# Altium PCB develer_2L_Ax_panel.PcbDoc
Units mm, origin at the board's own origin, x right, y up, seen from the top; angles counter-clockwise.
Board outline 129 x 103 mm, 6 copper layers (Top Layer, GND, Inner, Inner2, Power, Bottom Layer), stack 0.815 mm thick; 6 components, 77 nets, 10 pads, 0 vias.
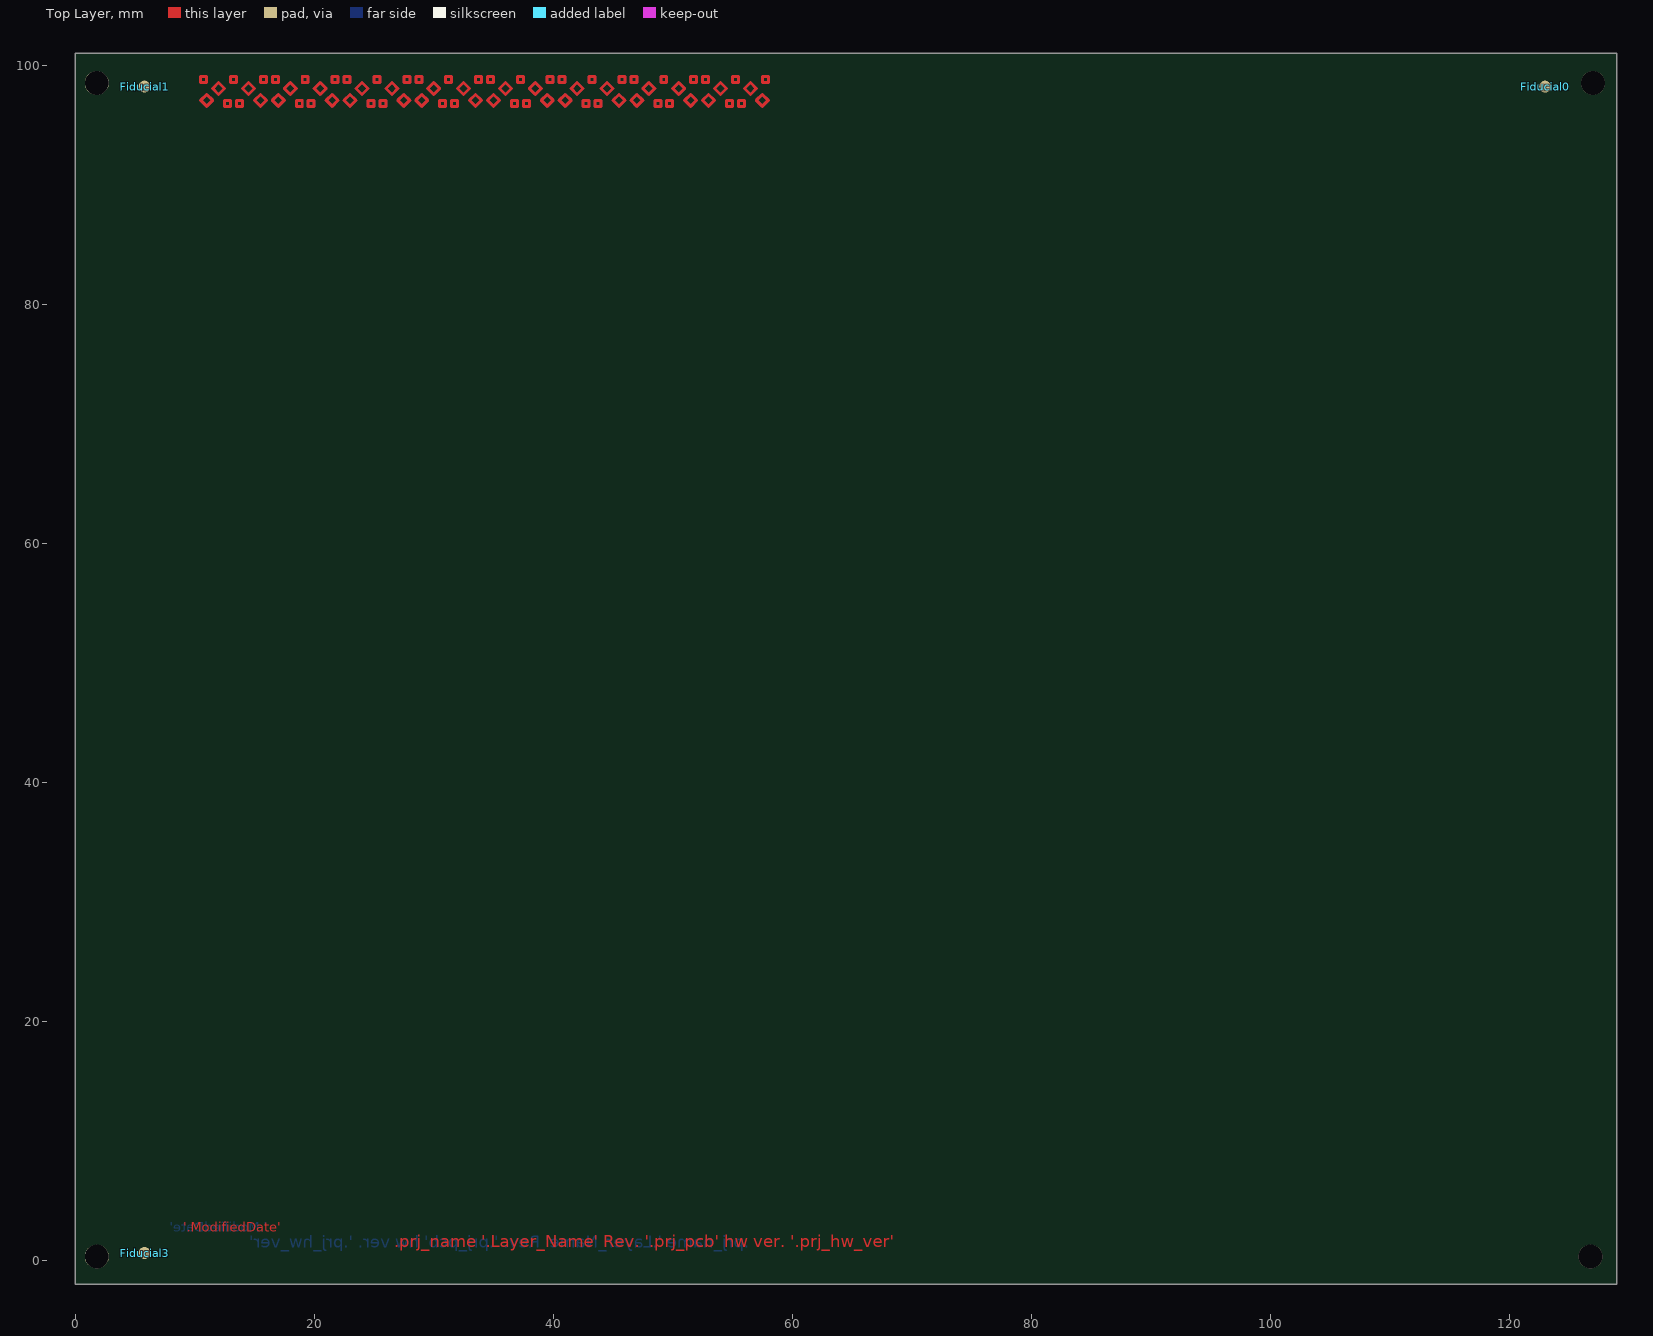
[diagram p0: Top Layer view]
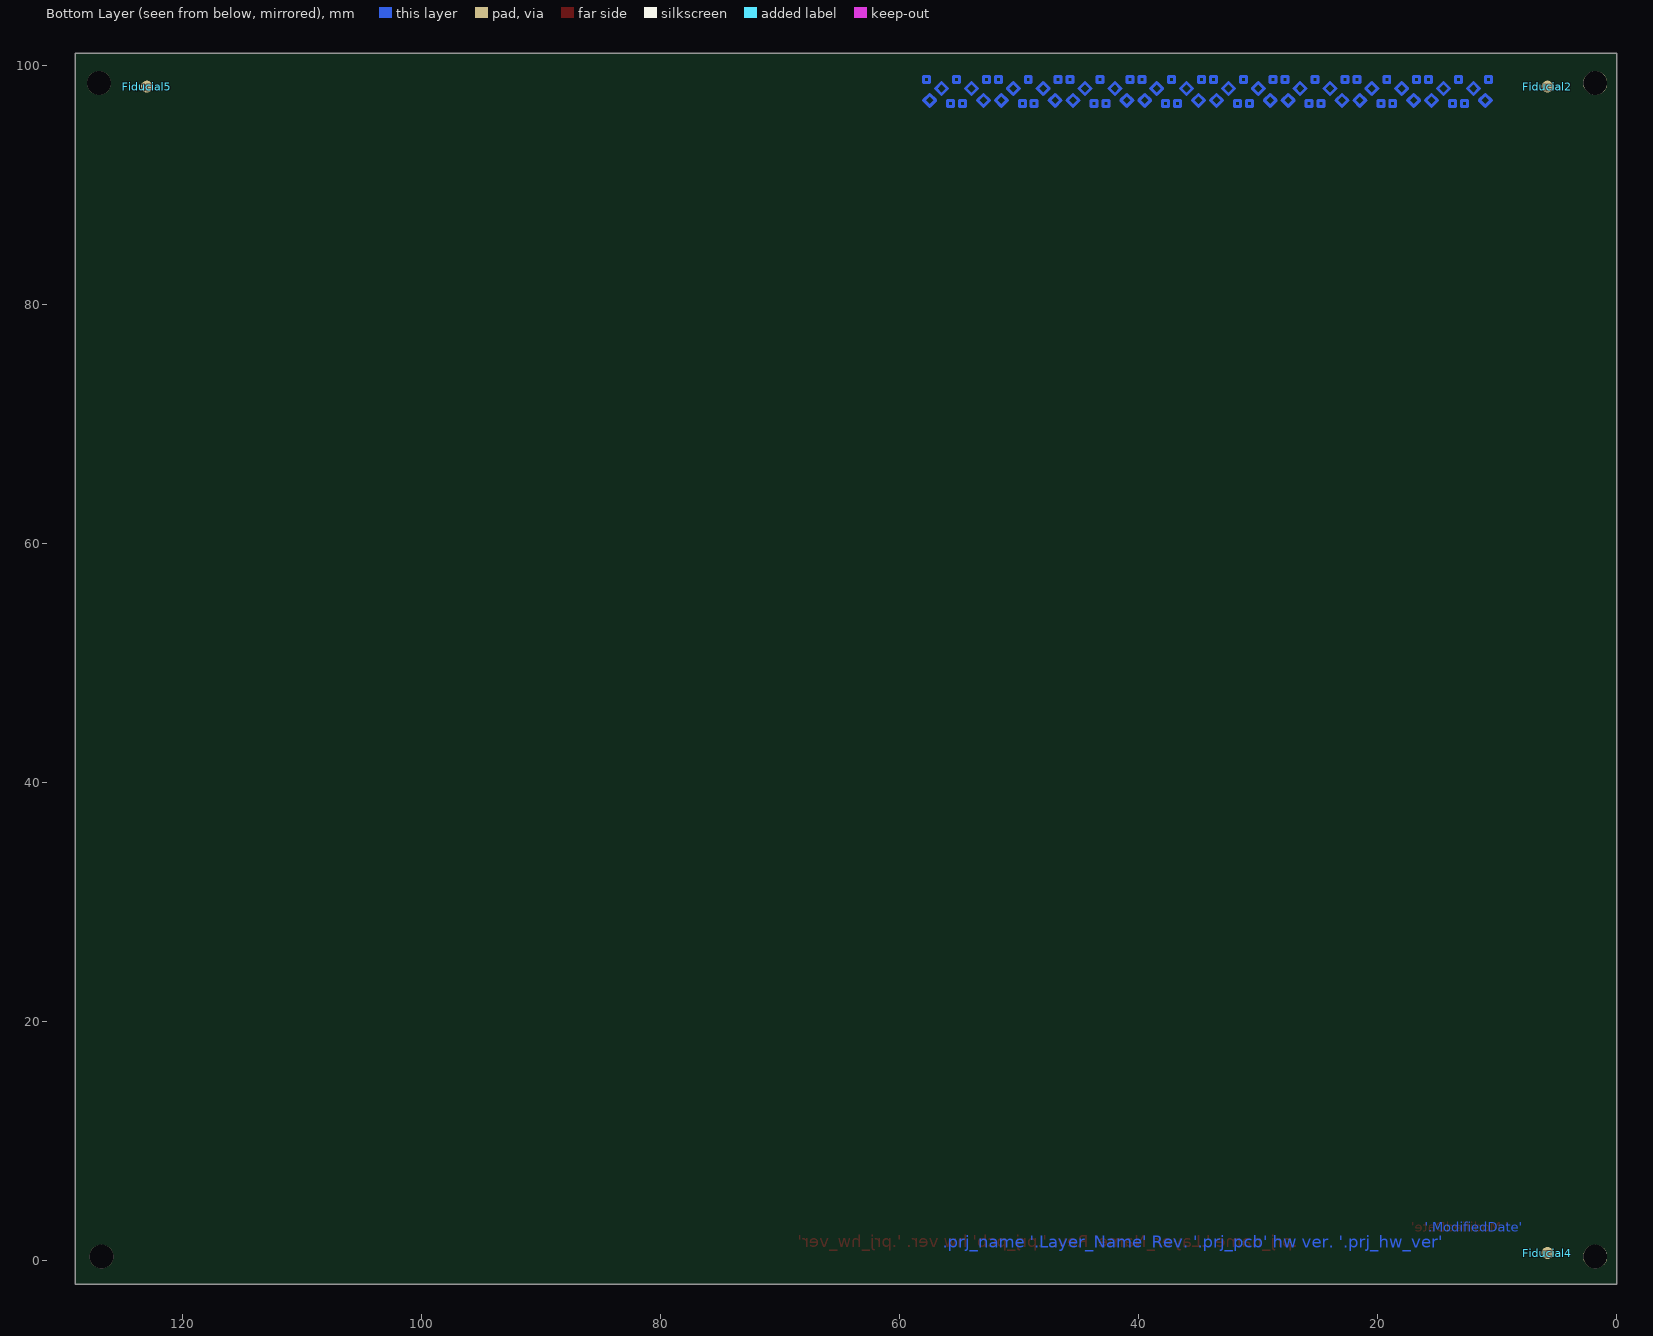
[diagram p1: Bottom Layer view, seen from below]
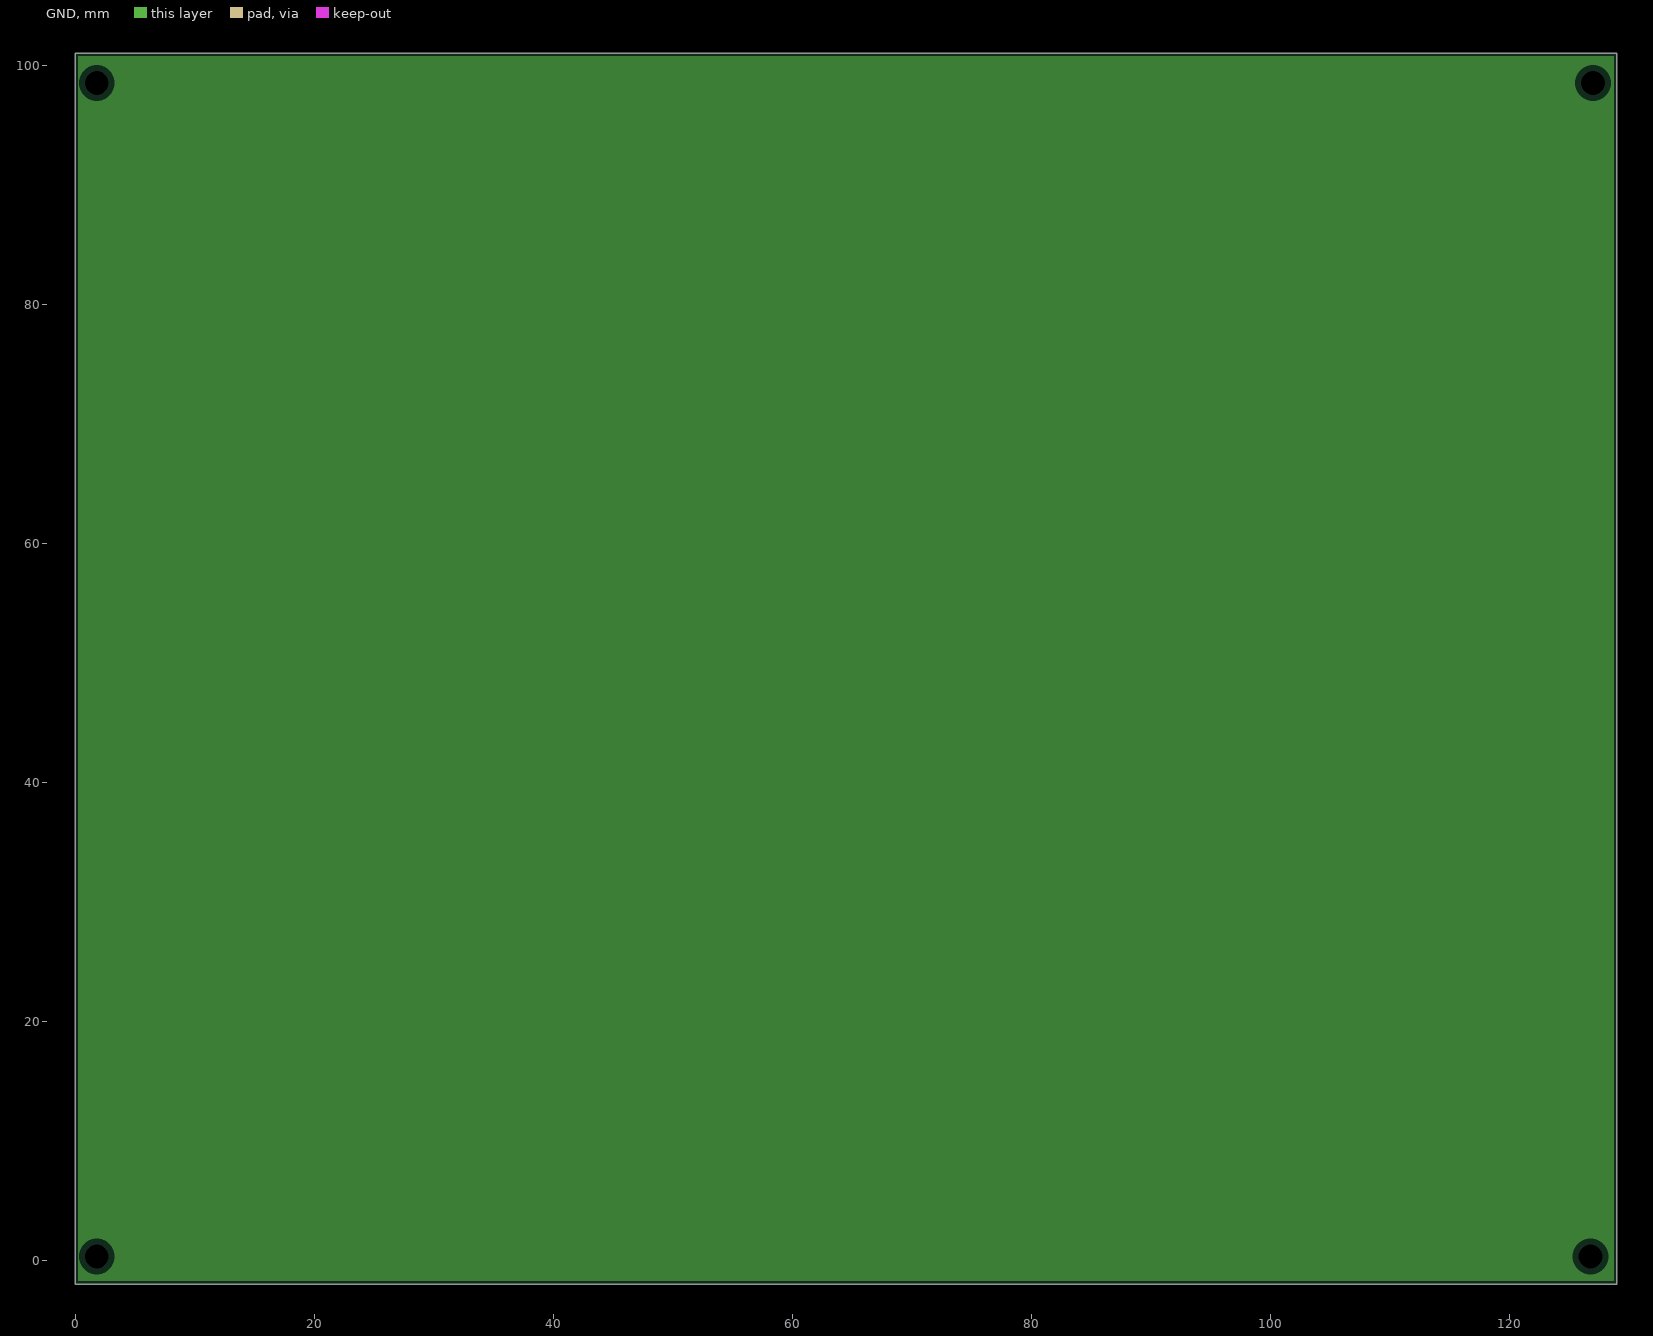
[diagram p2: GND, clearances drawn from the general rule]
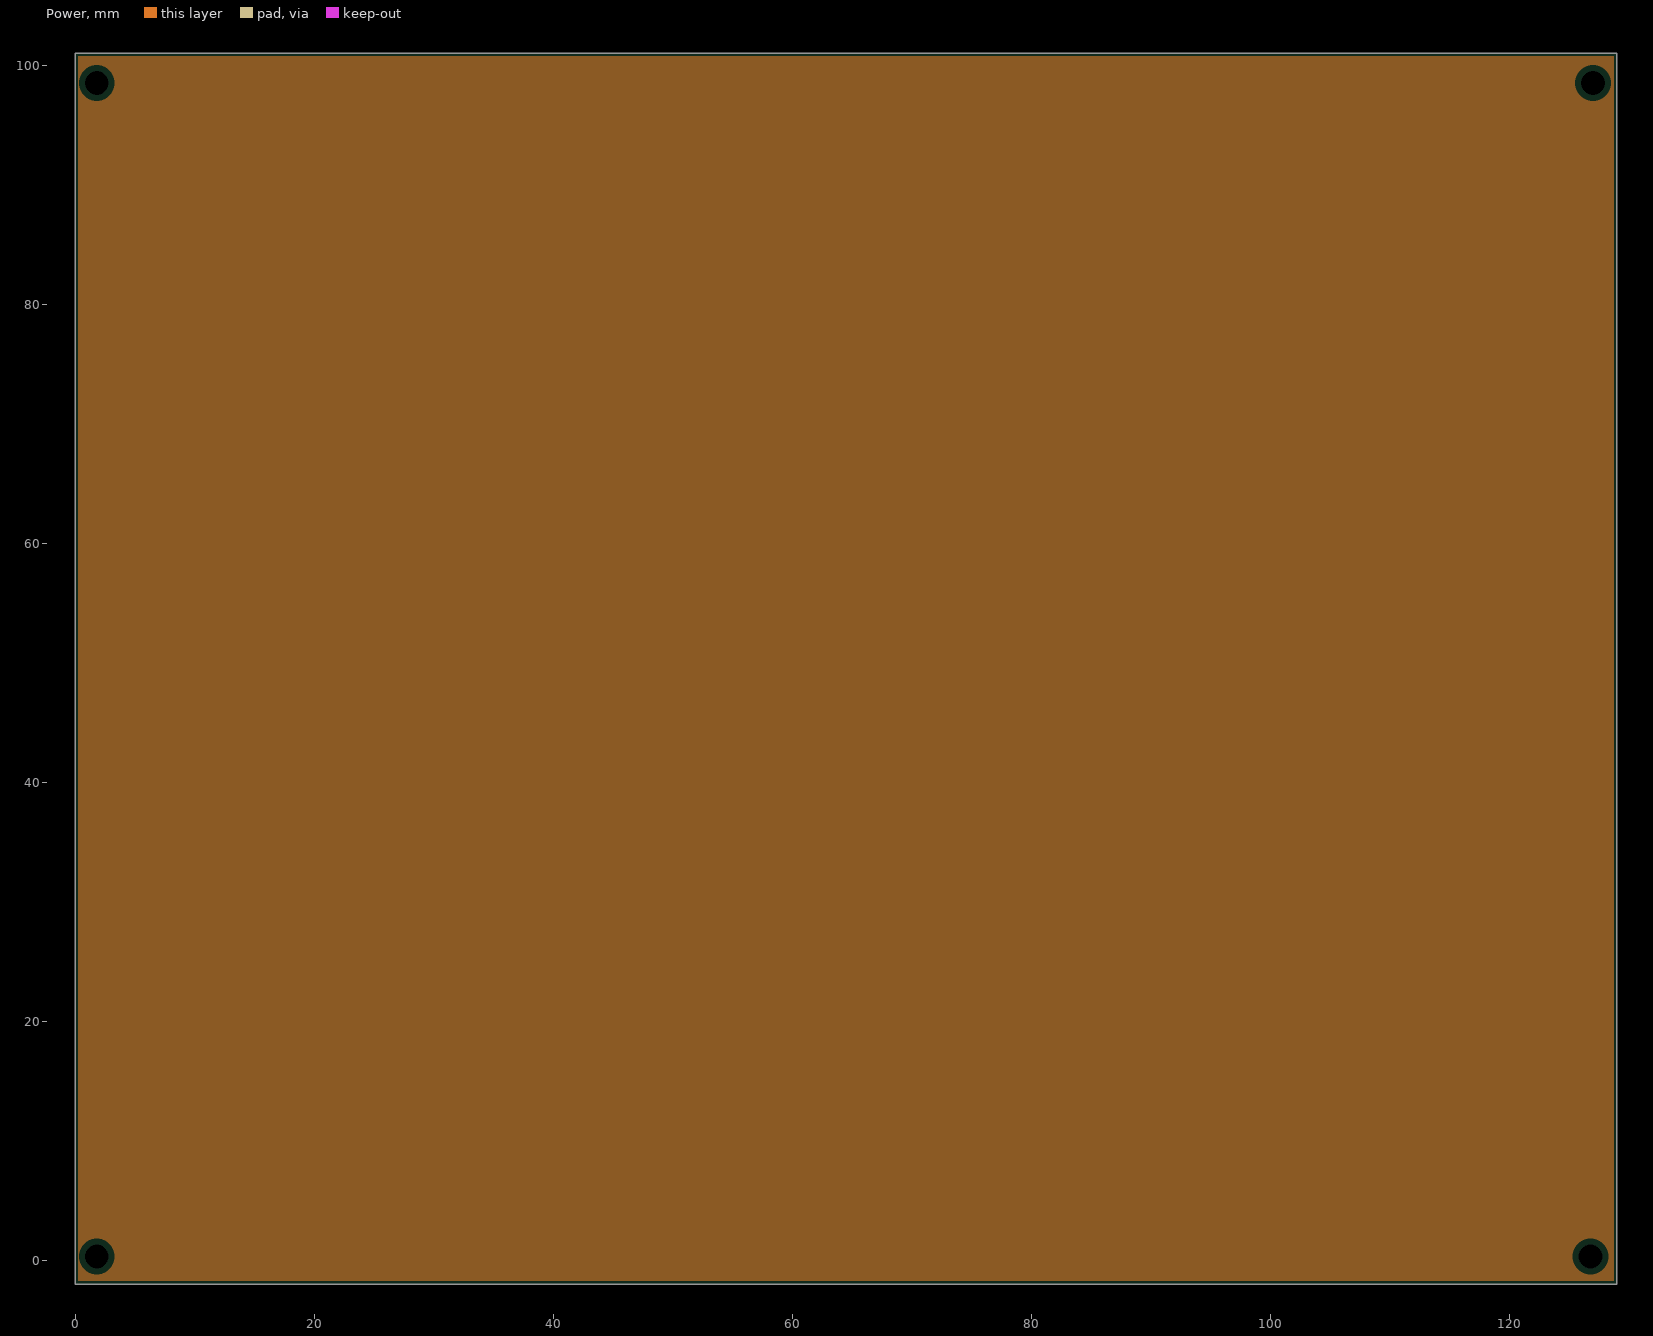
[diagram p3: Power, clearances drawn from the general rule]

## Layer stack, top to bottom
Top Solder: solder mask 0.0102, Solder Resist, Dk 3.5
Top Layer: signal copper 0.035
Dielectric1: prepreg 0.1042, IT180A 3310, Dk 4.15
GND: plane copper 0.018, net (Multiple Nets)
Dielectric5: core 0.13, IT180A FR-4, Dk 4.25
Inner: signal copper 0.018
Dielectric3: prepreg 0.2043, IT180A 3310, Dk 4.15
Inner2: signal copper 0.018
Dielectric2: core 0.13, IT180A FR-4, Dk 4.25
Power: plane copper 0.018, net (Multiple Nets)
Dielectric4: prepreg 0.1042, IT180A 3310, Dk 4.15
Bottom Layer: signal copper 0.035
Bottom Solder: solder mask 0.0102, Solder Resist, Dk 3.5

## Board outline
0,-2 0,101 129,101 129,-2

## Design rules (kind name [scope] priority, off if disabled: settings)
Clearance Clearance_eth_hole [(ObjectKind = 'Pad') And ((Name = 'J1-MH1') or (Name = 'J1-MH2'))] p1: gap=0 ignorepadtopadclearanceinfootprint=FALSE
Clearance Clearance_shld [InNet('SHLD') and InPolygon] p2: gap=0.9 ignorepadtopadclearanceinfootprint=FALSE
Clearance Clearance_gnd_planes [InPolygon and InNet('GND')] p3: gap=0.45 ignorepadtopadclearanceinfootprint=FALSE
Clearance Clearance_poe_vin [InNetClass('poe_vin') vs InPolygon] p4: gap=0.85 ignorepadtopadclearanceinfootprint=FALSE
Clearance Clearance_015 [InComponentClass('015')] p5: gap=0.15 ignorepadtopadclearanceinfootprint=FALSE
Clearance Clearance_diff_eth [InDifferentialPairClass('eth') vs not OnLayer('Keep-Out Layer')] p6: gap=0.35 ignorepadtopadclearanceinfootprint=FALSE except(0.45: Arc-Fill Arc-Poly Arc-Region Track-Fill Track-Poly Track-Region SMDPad-Fill SMDPad-Poly SMDPad-Region THPad-Fill THPad-Poly THPad-Region Via-Fill Via-Poly Via-Region Fill-Fill Fill-Poly Fill-Region Poly-Poly Poly-Region Region-Region)
Clearance Clearance_diff_eth_same [InDifferentialPairClass('eth')] p7: gap=0.15 ignorepadtopadclearanceinfootprint=FALSE
Clearance Clearance_diff_usb_same [InDifferentialPairClass('usb')] p8: gap=0.2 ignorepadtopadclearanceinfootprint=FALSE
Clearance [All vs not InAnyDifferentialPair] p9: gap=0.25 ignorepadtopadclearanceinfootprint=FALSE
ComponentClearance ComponentClearance_con [InComponent('J2') vs InComponent('J3')] p1: gap=0 collisioncheckmode=3 verticalgap=0 showdistances=FALSE
ComponentClearance ComponentClearance_con_1 [InComponent('J4') vs InComponent('J5')] p2: gap=0 collisioncheckmode=3 verticalgap=0 showdistances=FALSE
ComponentClearance ComponentClearance_con_2 [InComponent('J8') vs InComponent('J4')] p3: gap=0 collisioncheckmode=3 verticalgap=0 showdistances=FALSE
ComponentClearance ComponentClearance_logo [HasFootprint('Develer_logo_30x12mm_PCB_NOTE') vs HasFootprint('Develer_logo_30x12mm_TB_Top')] p4: gap=0 collisioncheckmode=3 verticalgap=0 showdistances=FALSE
ComponentClearance [All] p5: gap=0.25 collisioncheckmode=3 verticalgap=0.25 showdistances=FALSE
DiffPairsRouting DiffPairsRouting_eth [InDifferentialPair('ETHCONN-RX', 'ETHCONN-TX')] p1: maxlimit=0.15 minlimit=0.15 mostfreqgap=0.15 toplayer_minwidth=0.16 toplayer_maxwidth=0.16 toplayer_prefwidth=0.16 midlayer1_minwidth=0.16 midlayer1_maxwidth=0.16 midlayer1_prefwidth=0.16 midlayer2_minwidth=0.16 midlayer2_maxwidth=0.16 midlayer2_prefwidth=0.16 bottomlayer_minwidth=0.16 bottomlayer_maxwidth=0.16 bottomlayer_prefwidth=0.16 maxuncoupledlength=12.7
DiffPairsRouting DiffPairsRouting_eth_1 [InDifferentialPair('ETHRX', 'ETHTX')] p2: maxlimit=0.15 minlimit=0.15 mostfreqgap=0.15 toplayer_minwidth=0.16 toplayer_maxwidth=0.16 toplayer_prefwidth=0.16 midlayer1_minwidth=0.16 midlayer1_maxwidth=0.16 midlayer1_prefwidth=0.16 midlayer2_minwidth=0.16 midlayer2_maxwidth=0.16 midlayer2_prefwidth=0.16 bottomlayer_minwidth=0.16 bottomlayer_maxwidth=0.16 bottomlayer_prefwidth=0.16 maxuncoupledlength=12.7
DiffPairsRouting DiffPairsRouting_usb [InDifferentialPair('USBA', 'usbb')] p3: maxlimit=0.35 minlimit=0.2 mostfreqgap=0.2 toplayer_minwidth=0.22 toplayer_maxwidth=0.22 toplayer_prefwidth=0.22 midlayer1_minwidth=0.22 midlayer1_maxwidth=0.22 midlayer1_prefwidth=0.22 midlayer2_minwidth=0.22 midlayer2_maxwidth=0.22 midlayer2_prefwidth=0.22 bottomlayer_minwidth=0.22 bottomlayer_maxwidth=0.22 bottomlayer_prefwidth=0.22 maxuncoupledlength=2.7
Height [All] p1: minheight=0 maxheight=25 prefheight=12.5
HoleSize [All] p1: absolutevalues=TRUE maxlimit=10 minlimit=0.2 maxpercent=80.000 minpercent=20.000
HoleToHoleClearance [All] p1: gap=0.25 allowstackedmicrovias=TRUE
MatchedLengths MatchedLengths_usb [InDifferentialPair('USBA', 'usbb')] p1: tolerance=0.25 checknetsindiffpair=TRUE checkdiffpairvsdiffpair=FALSE checkxsignals=FALSE checkothers=FALSE
MatchedLengths MatchedLengths_eth [InDifferentialPair('ETHCONN-RX', 'ETHCONN-TX')] p2: tolerance=0.25 checknetsindiffpair=FALSE checkdiffpairvsdiffpair=TRUE checkxsignals=TRUE checkothers=TRUE
MatchedLengths MatchedLengths_eth_2 [InDifferentialPair('ETHRX', 'ETHTX')] p3: tolerance=0.25 checknetsindiffpair=FALSE checkdiffpairvsdiffpair=TRUE checkxsignals=TRUE checkothers=TRUE
MatchedLengths MatchedLengths_eth_1 [InDifferentialPair('ETHCONN-RX', 'ETHCONN-TX')] p4: tolerance=0.2 checknetsindiffpair=TRUE checkdiffpairvsdiffpair=FALSE checkxsignals=FALSE checkothers=FALSE
MatchedLengths MatchedLengths_eth_3 [InDifferentialPair('ETHRX', 'ETHTX')] p5: tolerance=0.2 checknetsindiffpair=TRUE checkdiffpairvsdiffpair=FALSE checkxsignals=FALSE checkothers=FALSE
MinimumSolderMaskSliver MinimumSolderMaskSliver_firma [HasFootprint('db_firma')] p1: minsoldermaskwidth=0
MinimumSolderMaskSliver [All] p2: minsoldermaskwidth=0.1
PlaneClearance PlaneClearance_poe_vin [InNetClass('poe_vin')] p1: clearance=0.65
PlaneClearance [All] p2: clearance=0.5
PlaneConnect PlaneConnect_poe [(ObjectKind = 'Pad') And (Name = 'U1-21')] p1: planeconnectstyle=Direct reliefexpansion=0.508 reliefentries=4 reliefconductorwidth=0.254 reliefairgap=0.254
PlaneConnect PlaneConnect_via [isvia] p2: planeconnectstyle=Direct reliefexpansion=0.508 reliefentries=4 reliefconductorwidth=0.254 reliefairgap=0.254
PlaneConnect [All] p3: planeconnectstyle=Relief reliefexpansion=0.3 reliefentries=4 reliefconductorwidth=0.3 reliefairgap=0.15
PolygonConnect PolygonConnect_1 [(ObjectKind = 'Pad') And (Name = 'U1-21')] p1: connectstyle=Direct reliefconductorwidth=0.254 reliefentries=4 polygonreliefangle="90 Angle" airgapwidth=0.254
PolygonConnect PolygonConnect_via [isvia] p2: connectstyle=Direct reliefconductorwidth=0.254 reliefentries=4 polygonreliefangle="90 Angle" airgapwidth=0.254
PolygonConnect [All] p3: connectstyle=Relief reliefconductorwidth=0.15 reliefentries=4 polygonreliefangle="90 Angle" airgapwidth=0.15
RoutingCorners [All] p1: cornerstyle=45-Degree minsetback=2.5 maxsetback=2.5
RoutingVias [All] p1: holewidth=0.3 width=0.6 viastyle="Through Hole" minholewidth=0.2 minwidth=0.3 maxholewidth=0.5 maxwidth=1
ShortCircuit ShortCircuit_eth_hole [(ObjectKind = 'Pad') And ((Name = 'J1-MH1') or (Name = 'J1-MH2'))] p1: allowed=TRUE
ShortCircuit [All] p2: allowed=FALSE
SilkToSilkClearance [All] p1: silktosilkclearance=0.15
SilkToSolderMaskClearance [IsPad] p1: minsilkscreentomaskgap=0.15 clearancetoexposedcopper=TRUE
SolderMaskExpansion SolderMaskExpansion_via [isVia] p1: expansion=-10 istentingtop=FALSE
SolderMaskExpansion [All] p2: expansion=0.05 istentingtop=FALSE
UnRoutedNet [All] p1: checkbadconnections=TRUE
Width [All] p1: maxlimit=5 minlimit=0.15 preferedwidth=0.25
17 further rules are at their usual default settings.

## Classes and differential pairs
net class diffpair: ETH_VDDA ETHCONN-RX_N ETHCONN-RX_P ETHCONN-TX_N ETHCONN-TX_P ETHRX_N ETHRX_P ETHTX_N ETHTX_P NetC27_2 NetC28_2 USBA_N USBA_P USBB_N USBB_P
net class poe_vin: CT1VC+ CT2VC- SP1VC+ SP2VC-
differential pair class usb: USBA USBB
differential pair class eth: ETHCONN-RX ETHCONN-TX ETHRX ETHTX
net class usb_diff: USBA_N USBA_P USBB_N USBB_P
component class usb: U?
differential pair ETHTX: +ETHTX_P -ETHTX_N
differential pair ETHRX: +ETHRX_P -ETHRX_N
differential pair USBB: +USBB_P -USBB_N
differential pair USBA: +USBA_P -USBA_N
differential pair ETHCONN-TX: +ETHCONN-TX_P -ETHCONN-TX_N
differential pair ETHCONN-RX: +ETHCONN-RX_P -ETHCONN-RX_N

## Components (designator, comment, footprint, x,y, rotation, side; value= is the part's Value field where it differs from the comment)
Fiducial0 "Comment" Fiducial_mark_nosilk 123,98.2 r0 top
Fiducial1 "Comment" Fiducial_mark_nosilk 5.8,98.2 r0 top
Fiducial2 "Comment" Fiducial_mark_nosilk 5.8,98.2 r0 bottom
Fiducial3 "Comment" Fiducial_mark_nosilk 5.8,0.6 r0 top
Fiducial4 "Comment" Fiducial_mark_nosilk 5.8,0.6 r0 bottom
Fiducial5 "Comment" Fiducial_mark_nosilk 123,98.2 r0 bottom

## Footprints (in the part's own frame and the unit in brackets; to place one, negate y for a bottom-side part, rotate by r counter-clockwise, add the part's x,y. Pads: shape width x height; smd on the part's side, far side on the other; paste and mask are expansions set on the pad)
Fiducial_mark_nosilk [mm]
  round 1 smd mask+1: "Fiducial Mark"(0,0)

## Free pads (board coordinates)
  round 2 hole 2: hole(1.8,0.3) hole(1.8,98.5) hole(126.8,0.3) hole(127,98.5)

## Nets (pads, with @x,y where several pads share a name; then routed paths per layer and width w, separated by ;. In a path a pad name is that pad's centre, name@x,y a point inside that pad or via, vN(x,y) a via of type N, cw(c..) or ccw(c..) an arc to the next point about the centre after c; other vN are vias at no path point)
CT1VC+: 
CT2VC-: 
ETH_VDD: 
ETH_VDDA: 
ETHCONN-RX_N: 
ETHCONN-RX_P: 
ETHCONN-TX_N: 
ETHCONN-TX_P: 
ETHRX_N: 
ETHRX_P: 
ETHTX_N: 
ETHTX_P: 
FB: 
GND: 
LED_ACT: 
LED_LINK: 
NetC5_2: 
NetC7_2: 
NetC9_2: 
NetC10_2: 
NetC11_2: 
NetC25_1: 
NetC25_2: 
NetC26_1: 
NetC26_2: 
NetC27_1: 
NetC27_2: 
NetC28_1: 
NetC28_2: 
NetD1_1: 
NetD3_1: 
NetD4_2: 
NetD5_2: 
NetJ2_3: 
NetJ2_4: 
NetJ2_5: 
NetJ2_6: 
NetJ2_7: 
NetJ2_8: 
NetJ2_9: 
NetJ2_10: 
NetJ2_11: 
NetJ2_12: 
NetJ2_13: 
NetJ2_14: 
NetJ3_1: 
NetJ3_2: 
NetJ3_3: 
NetJ3_4: 
NetJ3_5: 
NetJ3_6: 
NetJ3_7: 
NetJ3_8: 
NetJ4_4: 
NetJ4_6: 
NetJ4_10: 
NetJ7_2: 
NetJ7_3: 
NetL11_2: 
NetR7_1: 
NetR9_2: 
NetR11_2: 
NetR24_2: 
SHLD: 
SP1VC+: 
SP2VC-: 
SWO: 
to_shield: 
USBA_N: 
USBA_P: 
USBB_N: 
USBB_P: 
VDD_BUS: 
Vneg: 
Vpos: 
Vss: 
VSYS_5V: 
pads on no net: "Fiducial0.Fiducial Mark" "Fiducial1.Fiducial Mark" "Fiducial2.Fiducial Mark" "Fiducial3.Fiducial Mark" "Fiducial4.Fiducial Mark" "Fiducial5.Fiducial Mark"
copper on no net: | length 341
  Top Layer w0.25: 10.5,97.052 11,97.552 11.5,97.052 11,96.552 10.5,97.052 ; 10.5,98.552 10.5,99.052 11,99.052 11,98.552 10.5,98.552 ; 11.5,98.052 12,98.552 12.5,98.052 12,97.552 11.5,98.052 ; 12.5,96.552 13,96.552 13,97.052 12.5,97.052 12.5,96.552 ; 13,98.552 13.5,98.552 13.5,99.052 13,99.052 13,98.552 ; 13.5,96.552 13.5,97.052 14,97.052 14,96.552 13.5,96.552 ; 14,98.052 14.5,97.552 15,98.052 14.5,98.552 14,98.052 ; 15,97.052 15.5,96.552 16,97.052 15.5,97.552 15,97.052 ; 15.5,98.552 15.5,99.052 16,99.052 16,98.552 15.5,98.552 ; 16.5,97.052 17,96.552 17.5,97.052 17,97.552 16.5,97.052 ; 16.5,98.552 17,98.552 17,99.052 16.5,99.052 16.5,98.552 ; 17.5,98.052 18,97.552 18.5,98.052 18,98.552 17.5,98.052 ; 18.5,96.552 18.5,97.052 19,97.052 19,96.552 18.5,96.552 ; 19,98.552 19,99.052 19.5,99.052 19.5,98.552 19,98.552 ; 19.5,96.552 20,96.552 20,97.052 19.5,97.052 19.5,96.552 ; 20,98.052 20.5,98.552 21,98.052 20.5,97.552 20,98.052 ; 21,97.052 21.5,97.552 22,97.052 21.5,96.552 21,97.052 ; 21.5,98.552 22,98.552 22,99.052 21.5,99.052 21.5,98.552 ; 22.5,97.052 23,96.552 23.5,97.052 23,97.552 22.5,97.052 ; 22.5,98.552 23,98.552 23,99.052 22.5,99.052 22.5,98.552 ; 23.5,98.052 24,97.552 24.5,98.052 24,98.552 23.5,98.052 ; 24.5,96.552 24.5,97.052 25,97.052 25,96.552 24.5,96.552 ; 25,98.552 25,99.052 25.5,99.052 25.5,98.552 25,98.552 ; 25.5,96.552 26,96.552 26,97.052 25.5,97.052 25.5,96.552 ; 26,98.052 26.5,98.552 27,98.052 26.5,97.552 26,98.052 ; 27,97.052 27.5,97.552 28,97.052 27.5,96.552 27,97.052 ; 27.5,98.552 28,98.552 28,99.052 27.5,99.052 27.5,98.552 ; 28.5,97.052 29,96.552 29.5,97.052 29,97.552 28.5,97.052 ; 28.5,98.552 29,98.552 29,99.052 28.5,99.052 28.5,98.552 ; 29.5,98.052 30,97.552 30.5,98.052 30,98.552 29.5,98.052 ; 30.5,96.552 30.5,97.052 31,97.052 31,96.552 30.5,96.552 ; 31,98.552 31,99.052 31.5,99.052 31.5,98.552 31,98.552 ; 31.5,96.552 32,96.552 32,97.052 31.5,97.052 31.5,96.552 ; 32,98.052 32.5,98.552 33,98.052 32.5,97.552 32,98.052 ; 33,97.052 33.5,97.552 34,97.052 33.5,96.552 33,97.052 ; 33.5,98.552 34,98.552 34,99.052 33.5,99.052 33.5,98.552 ; 34.5,97.052 35,96.552 35.5,97.052 35,97.552 34.5,97.052 ; 34.5,98.552 35,98.552 35,99.052 34.5,99.052 34.5,98.552 ; 35.5,98.052 36,97.552 36.5,98.052 36,98.552 35.5,98.052 ; 36.5,96.552 36.5,97.052 37,97.052 37,96.552 36.5,96.552 ; 37,98.552 37,99.052 37.5,99.052 37.5,98.552 37,98.552 ; 37.5,96.552 38,96.552 38,97.052 37.5,97.052 37.5,96.552 ; 38,98.052 38.5,98.552 39,98.052 38.5,97.552 38,98.052 ; 39,97.052 39.5,97.552 40,97.052 39.5,96.552 39,97.052 ; 39.5,98.552 40,98.552 40,99.052 39.5,99.052 39.5,98.552 ; 40.5,97.052 41,96.552 41.5,97.052 41,97.552 40.5,97.052 ; 40.5,98.552 41,98.552 41,99.052 40.5,99.052 40.5,98.552 ; 41.5,98.052 42,97.552 42.5,98.052 42,98.552 41.5,98.052 ; 42.5,96.552 42.5,97.052 43,97.052 43,96.552 42.5,96.552 ; 43,98.552 43,99.052 43.5,99.052 43.5,98.552 43,98.552 ; 43.5,96.552 44,96.552 44,97.052 43.5,97.052 43.5,96.552 ; 44,98.052 44.5,98.552 45,98.052 44.5,97.552 44,98.052 ; 45,97.052 45.5,97.552 46,97.052 45.5,96.552 45,97.052 ; 45.5,98.552 46,98.552 46,99.052 45.5,99.052 45.5,98.552 ; 46.5,97.052 47,96.552 47.5,97.052 47,97.552 46.5,97.052 ; 46.5,98.552 47,98.552 47,99.052 46.5,99.052 46.5,98.552 ; 47.5,98.052 48,97.552 48.5,98.052 48,98.552 47.5,98.052 ; 48.5,96.552 48.5,97.052 49,97.052 49,96.552 48.5,96.552 ; 49,98.552 49,99.052 49.5,99.052 49.5,98.552 49,98.552 ; 49.5,96.552 50,96.552 50,97.052 49.5,97.052 49.5,96.552 ; 50,98.052 50.5,98.552 51,98.052 50.5,97.552 50,98.052 ; 51,97.052 51.5,97.552 52,97.052 51.5,96.552 51,97.052 ; 51.5,98.552 52,98.552 52,99.052 51.5,99.052 51.5,98.552 ; 52.5,97.052 53,96.552 53.5,97.052 53,97.552 52.5,97.052 ; 52.5,98.552 53,98.552 53,99.052 52.5,99.052 52.5,98.552 ; 53.5,98.052 54,97.552 54.5,98.052 54,98.552 53.5,98.052 ; 54.5,96.552 54.5,97.052 55,97.052 55,96.552 54.5,96.552 ; 55,98.552 55,99.052 55.5,99.052 55.5,98.552 55,98.552 ; 55.5,96.552 56,96.552 56,97.052 55.5,97.052 55.5,96.552 ; 56,98.052 56.5,98.552 57,98.052 56.5,97.552 56,98.052 ; 57,97.052 57.5,97.552 58,97.052 57.5,96.552 57,97.052 ; 57.5,98.552 58,98.552 58,99.052 57.5,99.052 57.5,98.552
  Bottom Layer w0.25: 10.5,97.052 11,96.552 11.5,97.052 11,97.552 10.5,97.052 ; 10.5,98.552 10.5,99.052 11,99.052 11,98.552 10.5,98.552 ; 11.5,98.052 12,98.552 12.5,98.052 12,97.552 11.5,98.052 ; 12.5,96.552 13,96.552 13,97.052 12.5,97.052 12.5,96.552 ; 13,98.552 13,99.052 13.5,99.052 13.5,98.552 13,98.552 ; 13.5,96.552 14,96.552 14,97.052 13.5,97.052 13.5,96.552 ; 14,98.052 14.5,98.552 15,98.052 14.5,97.552 14,98.052 ; 15,97.052 15.5,97.552 16,97.052 15.5,96.552 15,97.052 ; 15.5,98.552 16,98.552 16,99.052 15.5,99.052 15.5,98.552 ; 16.5,97.052 17,97.552 17.5,97.052 17,96.552 16.5,97.052 ; 16.5,98.552 17,98.552 17,99.052 16.5,99.052 16.5,98.552 ; 17.5,98.052 18,97.552 18.5,98.052 18,98.552 17.5,98.052 ; 18.5,96.552 18.5,97.052 19,97.052 19,96.552 18.5,96.552 ; 19,98.552 19.5,98.552 19.5,99.052 19,99.052 19,98.552 ; 19.5,96.552 19.5,97.052 20,97.052 20,96.552 19.5,96.552 ; 20,98.052 20.5,97.552 21,98.052 20.5,98.552 20,98.052 ; 21,97.052 21.5,96.552 22,97.052 21.5,97.552 21,97.052 ; 21.5,98.552 21.5,99.052 22,99.052 22,98.552 21.5,98.552 ; 22.5,97.052 23,97.552 23.5,97.052 23,96.552 22.5,97.052 ; 22.5,98.552 23,98.552 23,99.052 22.5,99.052 22.5,98.552 ; 23.5,98.052 24,97.552 24.5,98.052 24,98.552 23.5,98.052 ; 24.5,96.552 24.5,97.052 25,97.052 25,96.552 24.5,96.552 ; 25,98.552 25.5,98.552 25.5,99.052 25,99.052 25,98.552 ; 25.5,96.552 25.5,97.052 26,97.052 26,96.552 25.5,96.552 ; 26,98.052 26.5,97.552 27,98.052 26.5,98.552 26,98.052 ; 27,97.052 27.5,96.552 28,97.052 27.5,97.552 27,97.052 ; 27.5,98.552 27.5,99.052 28,99.052 28,98.552 27.5,98.552 ; 28.5,97.052 29,97.552 29.5,97.052 29,96.552 28.5,97.052 ; 28.5,98.552 29,98.552 29,99.052 28.5,99.052 28.5,98.552 ; 29.5,98.052 30,97.552 30.5,98.052 30,98.552 29.5,98.052 ; 30.5,96.552 30.5,97.052 31,97.052 31,96.552 30.5,96.552 ; 31,98.552 31.5,98.552 31.5,99.052 31,99.052 31,98.552 ; 31.5,96.552 31.5,97.052 32,97.052 32,96.552 31.5,96.552 ; 32,98.052 32.5,97.552 33,98.052 32.5,98.552 32,98.052 ; 33,97.052 33.5,96.552 34,97.052 33.5,97.552 33,97.052 ; 33.5,98.552 33.5,99.052 34,99.052 34,98.552 33.5,98.552 ; 34.5,97.052 35,97.552 35.5,97.052 35,96.552 34.5,97.052 ; 34.5,98.552 35,98.552 35,99.052 34.5,99.052 34.5,98.552 ; 35.5,98.052 36,97.552 36.5,98.052 36,98.552 35.5,98.052 ; 36.5,96.552 36.5,97.052 37,97.052 37,96.552 36.5,96.552 ; 37,98.552 37.5,98.552 37.5,99.052 37,99.052 37,98.552 ; 37.5,96.552 37.5,97.052 38,97.052 38,96.552 37.5,96.552 ; 38,98.052 38.5,97.552 39,98.052 38.5,98.552 38,98.052 ; 39,97.052 39.5,96.552 40,97.052 39.5,97.552 39,97.052 ; 39.5,98.552 39.5,99.052 40,99.052 40,98.552 39.5,98.552 ; 40.5,97.052 41,97.552 41.5,97.052 41,96.552 40.5,97.052 ; 40.5,98.552 41,98.552 41,99.052 40.5,99.052 40.5,98.552 ; 41.5,98.052 42,97.552 42.5,98.052 42,98.552 41.5,98.052 ; 42.5,96.552 42.5,97.052 43,97.052 43,96.552 42.5,96.552 ; 43,98.552 43.5,98.552 43.5,99.052 43,99.052 43,98.552 ; 43.5,96.552 43.5,97.052 44,97.052 44,96.552 43.5,96.552 ; 44,98.052 44.5,97.552 45,98.052 44.5,98.552 44,98.052 ; 45,97.052 45.5,96.552 46,97.052 45.5,97.552 45,97.052 ; 45.5,98.552 45.5,99.052 46,99.052 46,98.552 45.5,98.552 ; 46.5,97.052 47,97.552 47.5,97.052 47,96.552 46.5,97.052 ; 46.5,98.552 47,98.552 47,99.052 46.5,99.052 46.5,98.552 ; 47.5,98.052 48,97.552 48.5,98.052 48,98.552 47.5,98.052 ; 48.5,96.552 48.5,97.052 49,97.052 49,96.552 48.5,96.552 ; 49,98.552 49.5,98.552 49.5,99.052 49,99.052 49,98.552 ; 49.5,96.552 49.5,97.052 50,97.052 50,96.552 49.5,96.552 ; 50,98.052 50.5,97.552 51,98.052 50.5,98.552 50,98.052 ; 51,97.052 51.5,96.552 52,97.052 51.5,97.552 51,97.052 ; 51.5,98.552 51.5,99.052 52,99.052 52,98.552 51.5,98.552 ; 52.5,97.052 53,97.552 53.5,97.052 53,96.552 52.5,97.052 ; 52.5,98.552 53,98.552 53,99.052 52.5,99.052 52.5,98.552 ; 53.5,98.052 54,97.552 54.5,98.052 54,98.552 53.5,98.052 ; 54.5,96.552 54.5,97.052 55,97.052 55,96.552 54.5,96.552 ; 55,98.552 55.5,98.552 55.5,99.052 55,99.052 55,98.552 ; 55.5,96.552 55.5,97.052 56,97.052 56,96.552 55.5,96.552 ; 56,98.052 56.5,97.552 57,98.052 56.5,98.552 56,98.052 ; 57,97.052 57.5,96.552 58,97.052 57.5,97.552 57,97.052 ; 57.5,98.552 57.5,99.052 58,99.052 58,98.552 57.5,98.552

## Polygon pours and split planes (outlines as drawn)
GND on GND (split plane): 128.748,-1.748 0.252,-1.748 0.252,100.748 128.748,100.748
NetC27_2 on Power (split plane): 128.748,-1.748 0.252,-1.748 0.252,100.748 128.748,100.748

## Other copper
Top Layer:
  text "'.ModifiedDate'" at 9.05,2.386 h0.8
  text ".prj_name '.Layer_Name' Rev. '.prj_pcb' hw ver. '.prj_hw_ver'" at 26.7,1.102 h1
Bottom Layer:
  text "'.ModifiedDate'" at 16.05,2.386 h0.8
  text ".prj_name '.Layer_Name' Rev. '.prj_pcb' hw ver. '.prj_hw_ver'" at 56.4,1.05 h1

## Silkscreen, mask and mechanical layers (free items; w line width, h text height)
Assembly Top:
  text "'.Layer_Name'" at 87.202,-127 h5
  text "'.Layer_Name'" at 781.702,-138.5 h5
Assembly Bottom:
  text "'.Layer_Name'" at -82.626,-126.929 h5
Note Top:
  text "'.Layer_Name'" at 91.818,-127 h5
  text "'.Layer_Name'" at 786.318,-138.5 h5
Note Bottom:
  text "'.Layer_Name'" at -86.518,-126.929 h5
Drill Drawing:
  lines w0.254: -141.494,-60.518 -140.022,-60.518 -140.022,-59.046 -141.494,-59.046 -141.494,-60.518
  lines w0.35: -142.825,-61.512 -2.589,-61.512 ; -142.825,-58.199 -2.589,-58.199 ; -133.822,-64.825 -133.822,-54.886 ; -126.982,-64.825 -126.982,-54.886 ; -112.01,-64.825 -112.01,-54.886 ; -105.106,-64.825 -105.106,-54.886 ; -95.11,-64.825 -95.11,-54.886 ; -75.813,-64.825 -75.813,-54.886 ; -67.732,-64.825 -67.732,-54.886 ; -57.163,-64.825 -57.163,-54.886 ; -47.746,-64.825 -47.746,-54.886 ; -36.556,-64.825 -36.556,-54.886 ; -19.854,-64.825 -19.854,-54.886 ; -142.825,-64.825 -2.589,-64.825 -2.589,-54.886 -142.825,-54.886 -142.825,-64.825
  text "Symbol" at -140.837,-57.205 h1.92
  text "Count" at -132.828,-57.205 h1.92
  text "Hole Size" at -125.988,-57.205 h1.92
  text "Plated" at -111.016,-57.205 h1.92
  text "Hole Type" at -104.112,-57.205 h1.92
  text "Drill Layer Pair" at -94.116,-57.205 h1.92
  text "Via/Pad" at -74.819,-57.205 h1.92
  text "Pad Shape" at -66.739,-57.205 h1.92
  text "Template" at -56.169,-57.205 h1.92
  text "Description" at -46.752,-57.205 h1.92
  text "Hole Tolerance (+)" at -35.562,-57.205 h1.92
  text "Hole Tolerance (-)" at -18.86,-57.205 h1.92
  text "4" at -132.828,-60.518 h1.6
  text "78,74mil (2,000mm)" at -125.988,-60.518 h1.6
  text "PTH" at -111.016,-60.518 h1.6
  text "Round" at -104.112,-60.518 h1.6
  text "Top Layer - Bottom Layer" at -94.116,-60.518 h1.6
  text "Pad" at -74.819,-60.518 h1.6
  text "Rounded" at -66.739,-60.518 h1.6
  text "c200h200" at -56.169,-60.518 h1.6
  text "4 Total" at -132.828,-63.831 h1.6
PCB_Note_Panel:
  drawing of 696 lines, arcs and shapes, not listed
  text "REV:" at 401.25,461.75 h0.8
  text "DWG. NO." at 376.689,461.671 h0.8
  text "1" at 188.412,461.287 h1.2
  text "2" at 224.287,461.287 h1.2
  text "3" at 260.162,461.287 h1.2
  text "4" at 296.037,461.287 h1.2
  text "5" at 331.912,461.287 h1.2
  text "6" at 367.787,461.287 h1.2
  text "8" at 439.537,461.287 h1.2
  text ".prj_pcb" at 401.5,460.25 h1.27
  text ".PCB_DWG_NO" at 380,460 h1.27
  text "T" at 169.305,457.661 h1.5
  text "H" at 170.406,457.661 h1.5
  text "I" at 171.676,457.661 h1.5
  text "S" at 172.184,457.661 h1.5
  text "D" at 173.836,457.661 h1.5
  text "O" at 175.106,457.661 h1.5
  text "C" at 176.503,457.661 h1.5
  text "U" at 177.774,457.661 h1.5
  text "M" at 179.044,457.661 h1.5
  text "E" at 180.526,457.661 h1.5
  text "N" at 181.712,457.661 h1.5
  text "T" at 182.939,457.661 h1.5
  text "A" at 184.549,457.661 h1.5
  text "N" at 185.734,457.661 h1.5
  text "D" at 187.004,457.661 h1.5
  text "T" at 188.741,457.661 h1.5
  text "H" at 189.842,457.661 h1.5
  text "E" at 191.112,457.661 h1.5
  text "D" at 192.763,457.661 h1.5
  text "A" at 194.034,457.661 h1.5
  text "T" at 195.219,457.661 h1.5
  text "A" at 196.278,457.661 h1.5
  text "D" at 197.972,457.661 h1.5
  text "I" at 199.242,457.661 h1.5
  text "S" at 199.708,457.661 h1.5
  text "C" at 200.893,457.661 h1.5
  text "L" at 202.164,457.661 h1.5
  text "O" at 203.137,457.661 h1.5
  text "S" at 204.535,457.661 h1.5
  text "E" at 205.72,457.661 h1.5
  text "D" at 206.906,457.661 h1.5
  text "H" at 208.642,457.661 h1.5
  text "E" at 209.912,457.661 h1.5
  text "R" at 211.098,457.661 h1.5
  text "E" at 212.326,457.661 h1.5
  text "I" at 213.512,457.661 h1.5
  text "N" at 214.02,457.661 h1.5
  text "O" at 215.756,457.661 h1.5
  text "R" at 217.153,457.661 h1.5
  text "REVISIONS" at 401.187,456.833 h1.5
  text "H" at 169.305,455.629 h1.5
  text "E" at 170.575,455.629 h1.5
  text "R" at 171.761,455.629 h1.5
  text "E" at 173.031,455.629 h1.5
  text "W" at 174.174,455.629 h1.5
  text "I" at 175.91,455.629 h1.5
  text "T" at 176.376,455.629 h1.5
  text "H" at 177.477,455.629 h1.5
  text "I" at 179.213,455.629 h1.5
  text "S" at 179.721,455.629 h1.5
  text "T" at 181.373,455.629 h1.5
  text "H" at 182.474,455.629 h1.5
  text "E" at 183.744,455.629 h1.5
  text "P" at 185.395,455.629 h1.5
  text "R" at 186.581,455.629 h1.5
  text "O" at 187.851,455.629 h1.5
  text "P" at 189.224,455.629 h1.5
  text "E" at 190.41,455.629 h1.5
  text "R" at 191.595,455.629 h1.5
  text "T" at 192.823,455.629 h1.5
  text "Y" at 193.924,455.629 h1.5
  text "O" at 195.576,455.629 h1.5
  text "F" at 196.931,455.629 h1.5
  text "A" at 198.54,455.629 h1.5
  text "L" at 199.725,455.629 h1.5
  text "T" at 200.657,455.629 h1.5
  text "I" at 201.758,455.629 h1.5
  text "U" at 202.266,455.629 h1.5
  text "M" at 203.536,455.629 h1.5
  text "L" at 205.484,455.629 h1.5
  text "I" at 206.458,455.629 h1.5
  text "M" at 206.966,455.629 h1.5
  text "I" at 208.406,455.629 h1.5
  text "T" at 208.914,455.629 h1.5
  text "E" at 210.015,455.629 h1.5
  text "D" at 211.201,455.629 h1.5
  text "A" at 212.937,455.629 h1.5
  text "N" at 214.122,455.629 h1.5
  text "D" at 215.393,455.629 h1.5
  text "M" at 217.171,455.629 h1.5
  text "A" at 218.653,455.629 h1.5
  text "Y" at 219.796,455.629 h1.5
  text "ZONE" at 360.928,453.658 h1.5
  text "REV" at 369.31,453.658 h1.5
  text "DATE" at 430.778,453.658 h1.5
  text "B" at 169.305,453.596 h1.5
  text "E" at 170.49,453.596 h1.5
  text "F" at 172.184,453.596 h1.5
  text "R" at 173.285,453.596 h1.5
  text "E" at 174.555,453.596 h1.5
  text "E" at 175.699,453.596 h1.5
  text "L" at 176.884,453.596 h1.5
  text "Y" at 177.858,453.596 h1.5
  text "D" at 179.552,453.596 h1.5
  text "I" at 180.822,453.596 h1.5
  text "S" at 181.288,453.596 h1.5
  text "T" at 182.474,453.596 h1.5
  text "R" at 183.557,453.596 h1.5
  text "I" at 184.785,453.596 h1.5
  text "B" at 185.293,453.596 h1.5
  text "U" at 186.479,453.596 h1.5
  text "T" at 187.749,453.596 h1.5
  text "E" at 188.85,453.596 h1.5
  text "D" at 190.036,453.596 h1.5
  text "I" at 191.772,453.596 h1.5
  text "N" at 192.28,453.596 h1.5
  text "W" at 193.974,453.596 h1.5
  text "H" at 195.71,453.596 h1.5
  text "O" at 196.938,453.596 h1.5
  text "L" at 198.335,453.596 h1.5
  text "E" at 199.309,453.596 h1.5
  text "." at 200.495,453.596 h1.5
  text "N" at 201.468,453.596 h1.5
  text "O" at 202.739,453.596 h1.5
  text "R" at 204.644,453.596 h1.5
  text "I" at 205.872,453.596 h1.5
  text "G" at 206.38,453.596 h1.5
  text "H" at 207.778,453.596 h1.5
  text "T" at 209.006,453.596 h1.5
  text "S" at 210.107,453.596 h1.5
  text "A" at 211.758,453.596 h1.5
  text "R" at 212.944,453.596 h1.5
  text "E" at 214.214,453.596 h1.5
  text "DESCRIPTION" at 395.091,453.531 h1.5
  text "APPROVED" at 443.605,453.531 h1.5
  text "R" at 169.305,451.564 h1.5
  text "E" at 170.575,451.564 h1.5
  text "S" at 171.761,451.564 h1.5
  text "E" at 172.946,451.564 h1.5
  text "R" at 174.132,451.564 h1.5
  text "V" at 175.402,451.564 h1.5
  text "E" at 176.588,451.564 h1.5
  text "D" at 177.774,451.564 h1.5
  text "O" at 179.51,451.564 h1.5
  text "R" at 180.907,451.564 h1.5
  text "E" at 182.685,451.564 h1.5
  text "X" at 183.871,451.564 h1.5
  text "P" at 185.014,451.564 h1.5
  text "R" at 186.2,451.564 h1.5
  text "E" at 187.47,451.564 h1.5
  text "S" at 188.656,451.564 h1.5
  text "S" at 189.842,451.564 h1.5
  text "O" at 191.493,451.564 h1.5
  text "R" at 192.89,451.564 h1.5
  text "I" at 194.626,451.564 h1.5
  text "M" at 195.134,451.564 h1.5
  text "P" at 196.617,451.564 h1.5
  text "L" at 197.802,451.564 h1.5
  text "I" at 198.734,451.564 h1.5
  text "E" at 199.242,451.564 h1.5
  text "D" at 200.427,451.564 h1.5
  text "W" at 202.121,451.564 h1.5
  text "A" at 203.857,451.564 h1.5
  text "R" at 205.043,451.564 h1.5
  text "A" at 206.313,451.564 h1.5
  text "N" at 207.499,451.564 h1.5
  text "T" at 208.727,451.564 h1.5
  text "E" at 209.828,451.564 h1.5
  text "E" at 211.013,451.564 h1.5
  text "G" at 212.569,451.564 h1.5
  text "I" at 213.967,451.564 h1.5
  text "V" at 214.475,451.564 h1.5
  text "E" at 215.66,451.564 h1.5
  text "N" at 216.846,451.564 h1.5
  text "." at 218.074,451.564 h1.5
  text "A" at 370.072,450.229 h1.5
  text "ORIGINAL" at 396.996,450.229 h1.5
  text "A" at 167.287,448.287 h1.2
  text "A" at 458.287,448.287 h1.2
  text "B" at 167.287,423.287 h1.2
  text "B" at 458.287,423.287 h1.2
  text "C" at 167.287,398.287 h1.2
  text "C" at 458.287,398.287 h1.2
  text "!! DELETE ME !!" at 484,384 h10
  text "D" at 167.287,373.287 h1.2
  text "D" at 458.287,373.287 h1.2
  text "E" at 167.287,348.287 h1.2
  text "E" at 458.287,348.287 h1.2
  text "F" at 167.287,323.287 h1.2
  text "F" at 458.287,323.287 h1.2
  text "PROJECT" at 347.44,315.378 h1.2
  text "DATE" at 369.284,315.378 h1.2
  text ".pcb_organization" at 425.647,315.304 h1.2
  text "BOARD:" at 339.312,313.346 h1.2
  text ".pcb_address1" at 425.647,313.018 h1.2
  text ".prj_name" at 341.69,311.314 h1.25
  text ".prj_date" at 365.982,311.314 h1
  text ".pcb_address2" at 425.647,310.732 h1.2
  text "'.pcb_address3' - '.pcb_address4'" at 425.647,308.446 h1.2
  text "STATUS:" at 339.312,308.266 h1.2
  text "-  '.prj_status' -" at 341.74,305.836 h1.5
  text "TITLE:" at 377.768,305.451 h1.2
  text "VARIANT:" at 339.312,303.186 h1.2
  text ".prj_name_long" at 382.086,301.641 h2.54
  text ".VariantName" at 341.69,300.586 h1.25
  text "PART NO." at 304.87,300.394 h1.2
  text ".prj_part_number" at 312.871,300.394 h1.2
  text "DWG. NO." at 458.171,299.686 h0.8 r270
  text "G" at 167.287,298.287 h1.2
  text "UNLESS OTHERWISE SPECIFIED DIMENSIONS" at 305.378,297.727 h1.2
  text "APPROVALS" at 347.44,297.674 h1.2
  text "DATE" at 369.284,297.674 h1.2
  text ".pcb_title1" at 382.086,296.468 h2.54
  text ".PCB_DWG_NO" at 456.5,296.375 h1.27 r270
  text "AND TOLERANCE ARE IN INCHES AND" at 306.775,295.822 h1.2
  text "DESIGNER:" at 339.312,295.642 h1.2
  text "APPLY TO THE FINISHED PART" at 309.569,294.044 h1.2
  text ".PCB_DESIGNER" at 341.69,293.61 h1.25
  text ".PCB_DESIGNER_APP_DATE" at 365.982,293.61 h1
  text ".pcb_title2" at 382.086,291.968 h2.54
  text "TOLERANCE ON:" at 315.665,290.869 h1.2
  text "ENGINEER:" at 339.312,290.562 h1.2
  text ".PCB_ENGINEER_APP_DATE" at 365.982,288.784 h1
  text "2 DEC. PLACE" at 305.378,288.583 h1
  text "3 DEC. PLACE" at 316.935,288.583 h1
  text "ANGLES" at 330.524,288.583 h1
  text ".PCB_ENGINEER" at 341.69,288.53 h1.25
  text "LICENSE:" at 377.768,288.075 h1.2
  text "CHECKER:" at 339.312,285.482 h1.2
  text ".PCB_2_DEC_TOL" at 306.775,284.646 h1.5
  text ".PCB_3_DEC_TOL" at 317.824,284.646 h1.5
  text ".PCB_ANG_TOL" at 329.635,284.646 h1.5
  text ".prj_license" at 382.336,284.215 h2.54
  text ".PCB_CHECKER_APP_DATE" at 365.932,283.602 h1
  text ".PCB_CHECKER" at 341.69,283.45 h1.25
  text "THIRD ANGLE PROJECTION" at 285.744,283.12 h1
  text "MATERIAL:" at 305.378,281.011 h1.2
  text "LAYER:" at 377.768,279.998 h1.2
  text "REFERENCE DOCUMENTS" at 348.964,279.894 h1.2
  text "BOM:" at 339.312,277.354 h1.2
  text "PAGE FORMAT: /  - A4  210 x 297 /  - A3  297 x 420 /  - A2 420 x 594 /  - A1 597x 841 /  / Change TitleBlock with correct page size.  / Remember to update page size in titleblock!!" at 484,277 h5
  text "SEE NOTES" at 314.674,275.957 h1.5
  text "REV:" at 458.25,275.125 h0.8 r270
  text ".DOC_NO_BOM" at 347.44,275.068 h1.5
  text ".prj_pcb" at 456.75,274.875 h1.27 r270
  text "H" at 167.287,273.287 h1.2
  text "ASSY DWG:" at 339.312,272.528 h1.2
  text ".DOC_NO_ASSY_DWG" at 347.44,270.242 h1.5
  text "SIZE:" at 379.292,269.406 h1.2
  text "CAGE CODE:" at 385.515,269.406 h1.2
  text "DWG NO:" at 410.915,269.406 h1.2
  text "REV:" at 450.539,269.406 h1.2
  text "FAB DWG:" at 339.312,267.702 h1.2
  text ".PCB_DWG_NO" at 416.25,265.75 h2.54
  text ".prj_pcb" at 451.301,265.723 h2.54
  text ".DOC_NO_FAB_DWG" at 347.44,265.543 h1.5
  text "A4" at 379.079,265.48 h2.54
  text ".CAGE_CODE" at 389.833,265.469 h2.54
  text "SCHEMATIC:" at 339.312,262.876 h1.2
  text "PRINT DATE:" at 305.175,262.85 h1.2
  text "SCALE:" at 377.768,261.405 h1.2
  text "FILE NAME:" at 393.135,261.403 h1.2
  text "SHEET:" at 437.331,261.403 h1.2
  text ".DOC_NO_SCH_DWG" at 347.44,260.59 h1.5
  text "'.Print_Date', '.Print_Time'" at 307.75,260.5 h1.5
  text ".PCB_FILE_NAME_NO_PATH" at 401.847,260.26 h1.5
  text ".PCB_SCALE" at 384.626,260.135 h1.5
  text "OF" at 448.761,260.133 h1.2
  text "DOC-104 REV A" at 169,258.431 h0.55
  text "1" at 188.412,257.287 h1.2
  text "2" at 224.287,257.287 h1.2
  text "3" at 260.162,257.287 h1.2
  text "4" at 296.037,257.287 h1.2
  text "5" at 331.912,257.287 h1.2
  text "6" at 367.787,257.287 h1.2
  text "7" at 403.662,257.287 h1.2
  text "8" at 439.537,257.287 h1.2
  text "REV:" at 522.25,243.75 h0.8
  text "DWG. NO." at 497.689,243.671 h0.8
  text "1" at 180.287,243.287 h1.2
  text "2" at 207.287,243.287 h1.2
  text "3" at 232.287,243.287 h1.2
  text "4" at 257.287,243.287 h1.2
  text "5" at 282.287,243.287 h1.2
  text "6" at 307.287,243.287 h1.2
  text "7" at 332.287,243.287 h1.2
  text "8" at 359.287,243.287 h1.2
  text "9" at 388.287,243.287 h1.2
  text "10" at 413.287,243.287 h1.2
  text "11" at 438.287,243.287 h1.2
  text "12" at 463.287,243.287 h1.2
  text "13" at 488.287,243.287 h1.2
  text "15" at 538.287,243.287 h1.2
  text "16" at 568.287,243.287 h1.2
  text ".prj_pcb" at 522.5,242.25 h1.27
  text ".PCB_DWG_NO" at 501,242 h1.27
  text "T" at 169.305,239.661 h1.5
  text "H" at 170.406,239.661 h1.5
  text "I" at 171.676,239.661 h1.5
  text "S" at 172.184,239.661 h1.5
  text "D" at 173.836,239.661 h1.5
  text "O" at 175.106,239.661 h1.5
  text "C" at 176.503,239.661 h1.5
  text "U" at 177.774,239.661 h1.5
  text "M" at 179.044,239.661 h1.5
  text "E" at 180.526,239.661 h1.5
  text "N" at 181.712,239.661 h1.5
  text "T" at 182.939,239.661 h1.5
  text "A" at 184.549,239.661 h1.5
  text "N" at 185.734,239.661 h1.5
  text "D" at 187.004,239.661 h1.5
  text "T" at 188.741,239.661 h1.5
  text "H" at 189.842,239.661 h1.5
  text "E" at 191.112,239.661 h1.5
  text "D" at 192.763,239.661 h1.5
  text "A" at 194.034,239.661 h1.5
  text "T" at 195.219,239.661 h1.5
  text "A" at 196.278,239.661 h1.5
  text "D" at 197.972,239.661 h1.5
  text "I" at 199.242,239.661 h1.5
  text "S" at 199.708,239.661 h1.5
  text "C" at 200.893,239.661 h1.5
  text "L" at 202.164,239.661 h1.5
  text "O" at 203.137,239.661 h1.5
  text "S" at 204.535,239.661 h1.5
  text "E" at 205.72,239.661 h1.5
  text "D" at 206.906,239.661 h1.5
  text "H" at 208.642,239.661 h1.5
  text "E" at 209.912,239.661 h1.5
  text "R" at 211.098,239.661 h1.5
  text "E" at 212.326,239.661 h1.5
  text "I" at 213.512,239.661 h1.5
  text "N" at 214.02,239.661 h1.5
  text "O" at 215.756,239.661 h1.5
  text "R" at 217.153,239.661 h1.5
  text "REVISIONS" at 522.187,238.833 h1.5
  text "H" at 169.305,237.629 h1.5
  text "E" at 170.575,237.629 h1.5
  text "R" at 171.761,237.629 h1.5
  text "E" at 173.031,237.629 h1.5
  text "W" at 174.174,237.629 h1.5
  text "I" at 175.91,237.629 h1.5
  text "T" at 176.376,237.629 h1.5
  text "H" at 177.477,237.629 h1.5
  text "I" at 179.213,237.629 h1.5
  text "S" at 179.721,237.629 h1.5
  text "T" at 181.373,237.629 h1.5
  text "H" at 182.474,237.629 h1.5
  text "E" at 183.744,237.629 h1.5
  text "P" at 185.395,237.629 h1.5
  text "R" at 186.581,237.629 h1.5
  text "O" at 187.851,237.629 h1.5
  text "P" at 189.224,237.629 h1.5
  text "E" at 190.41,237.629 h1.5
  text "R" at 191.595,237.629 h1.5
  text "T" at 192.823,237.629 h1.5
  text "Y" at 193.924,237.629 h1.5
  text "O" at 195.576,237.629 h1.5
  text "F" at 196.931,237.629 h1.5
  text "A" at 198.54,237.629 h1.5
  text "L" at 199.725,237.629 h1.5
  text "T" at 200.657,237.629 h1.5
  text "I" at 201.758,237.629 h1.5
  text "U" at 202.266,237.629 h1.5
  text "M" at 203.536,237.629 h1.5
  text "L" at 205.484,237.629 h1.5
  text "I" at 206.458,237.629 h1.5
  text "M" at 206.966,237.629 h1.5
  text "I" at 208.406,237.629 h1.5
  text "T" at 208.914,237.629 h1.5
  text "E" at 210.015,237.629 h1.5
  text "D" at 211.201,237.629 h1.5
  text "A" at 212.937,237.629 h1.5
  text "N" at 214.122,237.629 h1.5
  text "D" at 215.393,237.629 h1.5
  text "M" at 217.171,237.629 h1.5
  text "A" at 218.653,237.629 h1.5
  text "Y" at 219.796,237.629 h1.5
  text "ZONE" at 481.928,235.658 h1.5
  text "REV" at 490.31,235.658 h1.5
  text "DATE" at 551.778,235.658 h1.5
  text "B" at 169.305,235.596 h1.5
  text "E" at 170.49,235.596 h1.5
  text "F" at 172.184,235.596 h1.5
  text "R" at 173.285,235.596 h1.5
  text "E" at 174.555,235.596 h1.5
  text "E" at 175.699,235.596 h1.5
  text "L" at 176.884,235.596 h1.5
  text "Y" at 177.858,235.596 h1.5
  text "D" at 179.552,235.596 h1.5
  text "I" at 180.822,235.596 h1.5
  text "S" at 181.288,235.596 h1.5
  text "T" at 182.474,235.596 h1.5
  text "R" at 183.557,235.596 h1.5
  text "I" at 184.785,235.596 h1.5
  text "B" at 185.293,235.596 h1.5
  text "U" at 186.479,235.596 h1.5
  text "T" at 187.749,235.596 h1.5
  text "E" at 188.85,235.596 h1.5
  text "D" at 190.036,235.596 h1.5
  text "I" at 191.772,235.596 h1.5
  text "N" at 192.28,235.596 h1.5
  text "W" at 193.974,235.596 h1.5
  text "H" at 195.71,235.596 h1.5
  text "O" at 196.938,235.596 h1.5
  text "L" at 198.335,235.596 h1.5
  text "E" at 199.309,235.596 h1.5
  text "." at 200.495,235.596 h1.5
  text "N" at 201.468,235.596 h1.5
  text "O" at 202.739,235.596 h1.5
  text "R" at 204.644,235.596 h1.5
  text "I" at 205.872,235.596 h1.5
  text "G" at 206.38,235.596 h1.5
  text "H" at 207.778,235.596 h1.5
  text "T" at 209.006,235.596 h1.5
  text "S" at 210.107,235.596 h1.5
  text "A" at 211.758,235.596 h1.5
  text "R" at 212.944,235.596 h1.5
  text "E" at 214.214,235.596 h1.5
  text "DESCRIPTION" at 516.091,235.531 h1.5
  text "APPROVED" at 564.605,235.531 h1.5
  text "R" at 169.305,233.564 h1.5
  text "E" at 170.575,233.564 h1.5
  text "S" at 171.761,233.564 h1.5
  text "E" at 172.946,233.564 h1.5
  text "R" at 174.132,233.564 h1.5
  text "V" at 175.402,233.564 h1.5
  text "E" at 176.588,233.564 h1.5
  text "D" at 177.774,233.564 h1.5
  text "O" at 179.51,233.564 h1.5
  text "R" at 180.907,233.564 h1.5
  text "E" at 182.685,233.564 h1.5
  text "X" at 183.871,233.564 h1.5
  text "P" at 185.014,233.564 h1.5
  text "R" at 186.2,233.564 h1.5
  text "E" at 187.47,233.564 h1.5
  text "S" at 188.656,233.564 h1.5
  text "S" at 189.842,233.564 h1.5
  text "O" at 191.493,233.564 h1.5
  text "R" at 192.89,233.564 h1.5
  text "I" at 194.626,233.564 h1.5
  text "M" at 195.134,233.564 h1.5
  text "P" at 196.617,233.564 h1.5
  text "L" at 197.802,233.564 h1.5
  text "I" at 198.734,233.564 h1.5
  text "E" at 199.242,233.564 h1.5
  text "D" at 200.427,233.564 h1.5
  text "W" at 202.121,233.564 h1.5
  text "A" at 203.857,233.564 h1.5
  text "R" at 205.043,233.564 h1.5
  text "A" at 206.313,233.564 h1.5
  text "N" at 207.499,233.564 h1.5
  text "T" at 208.727,233.564 h1.5
  text "E" at 209.828,233.564 h1.5
  text "E" at 211.013,233.564 h1.5
  text "G" at 212.569,233.564 h1.5
  text "I" at 213.967,233.564 h1.5
  text "V" at 214.475,233.564 h1.5
  text "E" at 215.66,233.564 h1.5
  text "N" at 216.846,233.564 h1.5
  text "." at 218.074,233.564 h1.5
  text "A" at 491.072,232.229 h1.5
  text "ORIGINAL" at 517.996,232.229 h1.5
  text "A" at 167.287,222.287 h1.2
  text "A" at 579.287,222.287 h1.2
  text "B" at 167.287,189.287 h1.2
  text "B" at 579.287,189.287 h1.2
  text "PCB Build Notes:" at -155.5,156 h3
  text "PCB Build Notes:" at -155.5,156 h3
  text "C" at 167.287,153.412 h1.2
  text "C" at 579.287,153.412 h1.2
  text "1. Layers: '.pcb_layer_count' / 2. Base Material: '.pcb_material' / 3. Plating Finish: '.pcb_finish' / 4. Silkscreen Color: .'.pcb_silkscreen_color' / 5. Solder Color: '.pcb_solder_color'" at -152.3,130.3 h2.5
  text "Other Notes:" at -155.5,123.6 h3
  text "Other Notes:" at -155.5,123.6 h3
  text "A  Differential Pair 90ohm +/- 10%" at -152.15,118.414 h2.5
  text "D" at 167.287,117.537 h1.2
  text "D" at 579.287,117.537 h1.2
  text "B  Single Ended 50ohm +/- 10%" at -152.05,113.799 h2.5
  text "C  Differential Pair 100ohm +/- 10%" at -152.15,109.307 h2.5
  text "Layer" at -150.167,84.863 h1.5
  text "Name" at -141.261,84.863 h1.5
  text "Material" at -121.943,84.863 h1.5
  text "Thickness" at -105.074,84.863 h1.5
  text "Constant" at -91.948,84.863 h1.5
  text "Gerber" at -79.428,84.863 h1.5
  text "Board Layer Stack" at -69.501,84.863 h1.5
  text "Top Overlay" at -141.261,81.863 h1.5
  text "GTO" at -79.428,81.863 h1.5
  text "E" at 167.287,81.662 h1.2
  text "E" at 579.287,81.662 h1.2
  text "Top Solder" at -141.261,78.863 h1.5
  text "Solder Resist" at -121.943,78.863 h1.5
  text "0,010mm" at -105.074,78.863 h1.5
  text "3.5" at -91.948,78.863 h1.5
  text "GTS" at -79.428,78.863 h1.5
  text "1" at -150.167,75.863 h1.5
  text "Top Layer" at -141.261,75.863 h1.5
  text "0,035mm" at -105.074,75.863 h1.5
  text "GTL" at -79.428,75.863 h1.5
  text "Dielectric1" at -141.261,72.863 h1.5
  text "IT180A 3310" at -121.943,72.863 h1.5
  text "0,104mm" at -105.074,72.863 h1.5
  text "4.15" at -91.948,72.863 h1.5
  text "2" at -150.167,69.863 h1.5
  text "GND" at -141.261,69.863 h1.5
  text "0,018mm" at -105.074,69.863 h1.5
  text "GP1" at -79.428,69.863 h1.5
  text "Dielectric5" at -141.261,66.863 h1.5
  text "IT180A FR-4" at -121.943,66.863 h1.5
  text "0,130mm" at -105.074,66.863 h1.5
  text "4.25" at -91.948,66.863 h1.5
  text "3" at -150.167,63.863 h1.5
  text "Inner" at -141.261,63.863 h1.5
  text "0,018mm" at -105.074,63.863 h1.5
  text "G1" at -79.428,63.863 h1.5
  text "Dielectric3" at -141.261,60.863 h1.5
  text "IT180A 3310" at -121.943,60.863 h1.5
  text "0,204mm" at -105.074,60.863 h1.5
  text "4.15" at -91.948,60.863 h1.5
  text "4" at -150.167,57.863 h1.5
  text "Inner2" at -141.261,57.863 h1.5
  text "0,018mm" at -105.074,57.863 h1.5
  text "G2" at -79.428,57.863 h1.5
  text "Dielectric2" at -141.261,54.863 h1.5
  text "IT180A FR-4" at -121.943,54.863 h1.5
  text "0,130mm" at -105.074,54.863 h1.5
  text "4.25" at -91.948,54.863 h1.5
  text "5" at -150.167,51.863 h1.5
  text "Power" at -141.261,51.863 h1.5
  text "0,018mm" at -105.074,51.863 h1.5
  text "GP2" at -79.428,51.863 h1.5
  text "Dielectric4" at -141.261,48.863 h1.5
  text "IT180A 3310" at -121.943,48.863 h1.5
  text "0,104mm" at -105.074,48.863 h1.5
  text "4.15" at -91.948,48.863 h1.5
  text "6" at -150.167,45.863 h1.5
  text "Bottom Layer" at -141.261,45.863 h1.5
  text "0,035mm" at -105.074,45.863 h1.5
  text "GBL" at -79.428,45.863 h1.5
  text "F" at 167.287,45.787 h1.2
  text "F" at 579.287,45.787 h1.2
  text "Bottom Solder" at -141.261,42.863 h1.5
  text "Solder Resist" at -121.943,42.863 h1.5
  text "0,010mm" at -105.074,42.863 h1.5
  text "3.5" at -91.948,42.863 h1.5
  text "GBS" at -79.428,42.863 h1.5
  text "Bottom Overlay" at -141.261,39.863 h1.5
  text "GBO" at -79.428,39.863 h1.5
  text "Total board thickness:" at -150.167,36.863 h1.5
  text "0,834mm" at -105.074,36.863 h1.5
  text "PROJECT" at 468.44,10.378 h1.2
  text "DATE" at 490.284,10.378 h1.2
  text ".pcb_organization" at 546.647,10.304 h1.2
  text "G" at 167.287,9.912 h1.2
  text "G" at 579.287,9.912 h1.2
  text "BOARD:" at 460.312,8.346 h1.2
  text ".pcb_address1" at 546.647,8.018 h1.2
  text ".prj_name" at 462.69,6.314 h1.25
  text ".prj_date" at 486.982,6.314 h1
  text ".pcb_address2" at 546.647,5.732 h1.2
  text "'.pcb_address3' - '.pcb_address4'" at 546.647,3.446 h1.2
  text "STATUS:" at 460.312,3.266 h1.2
  text "-  '.prj_status' -" at 462.74,0.836 h1.5
  text "TITLE:" at 498.768,0.451 h1.2
  text "VARIANT:" at 460.312,-1.814 h1.2
  text ".prj_name_long" at 503.086,-3.359 h2.54
  text ".VariantName" at 462.69,-4.414 h1.25
  text "PART NO." at 425.87,-4.606 h1.2
  text ".prj_part_number" at 433.871,-4.606 h1.2
  text "DWG. NO." at 579.171,-5.314 h0.8 r270
  text "UNLESS OTHERWISE SPECIFIED DIMENSIONS" at 426.378,-7.273 h1.2
  text "APPROVALS" at 468.44,-7.326 h1.2
  text "DATE" at 490.284,-7.326 h1.2
  text ".pcb_title1" at 503.086,-8.532 h2.54
  text ".PCB_DWG_NO" at 577.5,-8.625 h1.27 r270
  text "AND TOLERANCE ARE IN INCHES AND" at 427.775,-9.178 h1.2
  text "DESIGNER:" at 460.312,-9.358 h1.2
  text "APPLY TO THE FINISHED PART" at 430.569,-10.956 h1.2
  text ".PCB_DESIGNER" at 462.69,-11.39 h1.25
  text ".PCB_DESIGNER_APP_DATE" at 486.982,-11.39 h1
  text ".pcb_title2" at 503.086,-13.032 h2.54
  text "TOLERANCE ON:" at 436.665,-14.131 h1.2
  text "ENGINEER:" at 460.312,-14.438 h1.2
  text ".PCB_ENGINEER_APP_DATE" at 486.982,-16.216 h1
  text "2 DEC. PLACE" at 426.378,-16.417 h1
  text "3 DEC. PLACE" at 437.935,-16.417 h1
  text "ANGLES" at 451.524,-16.417 h1
  text ".PCB_ENGINEER" at 462.69,-16.47 h1.25
  text "LICENSE:" at 498.768,-16.925 h1.2
  text "CHECKER:" at 460.312,-19.518 h1.2
  text ".PCB_2_DEC_TOL" at 427.775,-20.354 h1.5
  text ".PCB_3_DEC_TOL" at 438.824,-20.354 h1.5
  text ".PCB_ANG_TOL" at 450.635,-20.354 h1.5
  text ".prj_license" at 503.336,-20.785 h2.54
  text ".PCB_CHECKER_APP_DATE" at 486.932,-21.398 h1
  text ".PCB_CHECKER" at 462.69,-21.55 h1.25
  text "THIRD ANGLE PROJECTION" at 406.744,-21.88 h1
  text "MATERIAL:" at 426.378,-23.989 h1.2
  text "LAYER:" at 498.768,-25.002 h1.2
  text "REFERENCE DOCUMENTS" at 469.964,-25.106 h1.2
  text "H" at 167.287,-25.963 h1.2
  text "BOM:" at 460.312,-27.646 h1.2
  text "SEE NOTES" at 435.674,-29.043 h1.5
  text "REV:" at 579.25,-29.875 h0.8 r270
  text ".DOC_NO_BOM" at 468.44,-29.932 h1.5
  text ".prj_pcb" at 577.75,-30.125 h1.27 r270
  text "ASSY DWG:" at 460.312,-32.472 h1.2
  text ".DOC_NO_ASSY_DWG" at 468.44,-34.758 h1.5
  text "SIZE:" at 500.292,-35.594 h1.2
  text "CAGE CODE:" at 506.515,-35.594 h1.2
  text "DWG NO:" at 531.915,-35.594 h1.2
  text "REV:" at 571.539,-35.594 h1.2
  text "FAB DWG:" at 460.312,-37.298 h1.2
  text ".PCB_DWG_NO" at 537.25,-39.25 h2.54
  text ".prj_pcb" at 572.301,-39.277 h2.54
  text ".DOC_NO_FAB_DWG" at 468.44,-39.457 h1.5
  text "A3" at 500.14,-39.52 h2.54
  text ".CAGE_CODE" at 510.833,-39.531 h2.54
  text "SCHEMATIC:" at 460.312,-42.124 h1.2
  text "PRINT DATE:" at 426.175,-42.15 h1.2
  text "SCALE:" at 498.768,-43.595 h1.2
  text "FILE NAME:" at 514.135,-43.597 h1.2
  text "SHEET:" at 558.331,-43.597 h1.2
  text ".DOC_NO_SCH_DWG" at 468.44,-44.41 h1.5
  text "'.Print_Date', '.Print_Time'" at 428.75,-44.5 h1.5
  text ".PCB_FILE_NAME_NO_PATH" at 522.847,-44.74 h1.5
  text ".PCB_SCALE" at 505.626,-44.865 h1.5
  text "OF" at 569.761,-44.867 h1.2
  text "DOC-104 REV A" at 169,-46.569 h0.55
  text "1" at 180.287,-47.713 h1.2
  text "2" at 207.287,-47.713 h1.2
  text "3" at 232.287,-47.713 h1.2
  text "4" at 257.287,-47.713 h1.2
  text "5" at 282.287,-47.713 h1.2
  text "6" at 307.287,-47.713 h1.2
  text "7" at 332.287,-47.713 h1.2
  text "8" at 359.287,-47.713 h1.2
  text "9" at 388.287,-47.713 h1.2
  text "10" at 413.287,-47.713 h1.2
  text "11" at 438.287,-47.713 h1.2
  text "12" at 463.287,-47.713 h1.2
  text "13" at 488.287,-47.713 h1.2
  text "14" at 513.287,-47.713 h1.2
  text "15" at 538.287,-47.713 h1.2
  text "16" at 568.287,-47.713 h1.2
Route Tool Path:
  the board outline again, w0.3
V Cut:
  region: 55,129 58,127.5 61.125,130.625 58,122
  lines w0.25: 58,122 61.125,130.625 ; 58,122 58,127.5 ; 58,122 55,129 58,127.5 ; 58,127.5 61.125,130.625 ; 58,127.5 61.125,130.625
  lines w0.35: 0,5 129,5 ; 0,94 129,94
  lines w0.5: 64.5,-18.5 64.5,118
  lines w0.55: 58,118 58,142.5
  text "V-CUT" at 50,115 h5 r90
Outline Panel:
  the board outline again, w0.1

## Panel: embedded boards
"display.PcbDoc" at 64.5,5, 1 rows x 1 columns, spacing 63.5 x 38.1, rotation 90